# EAGLE board 9x9_backpack (EAGLE 6.2)
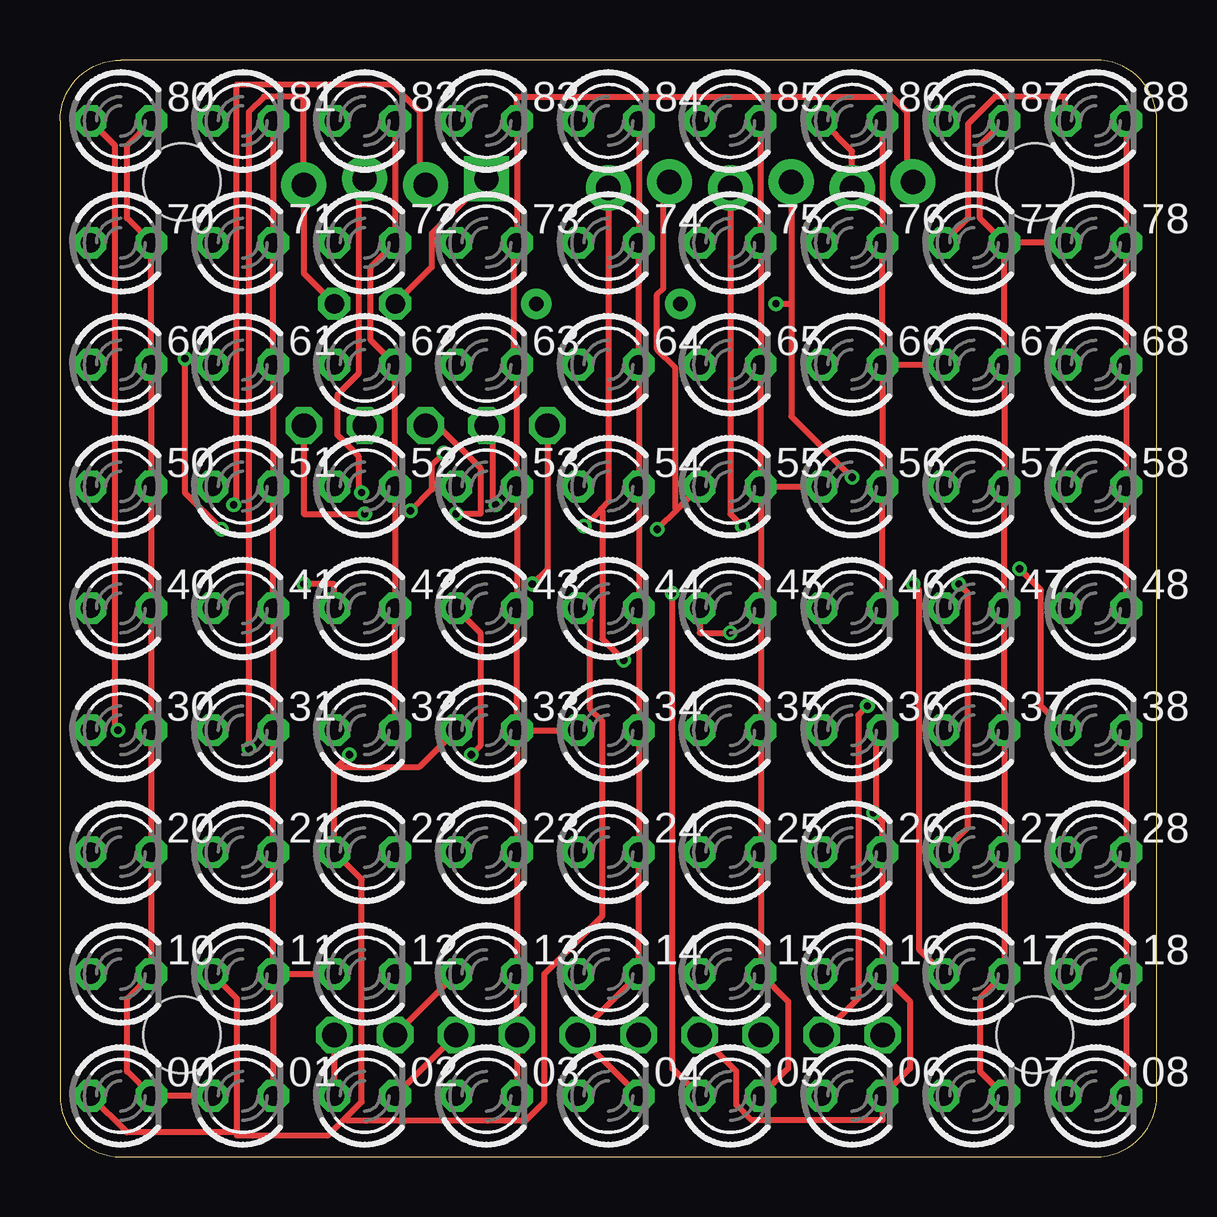
[diagram p0: board, top side]
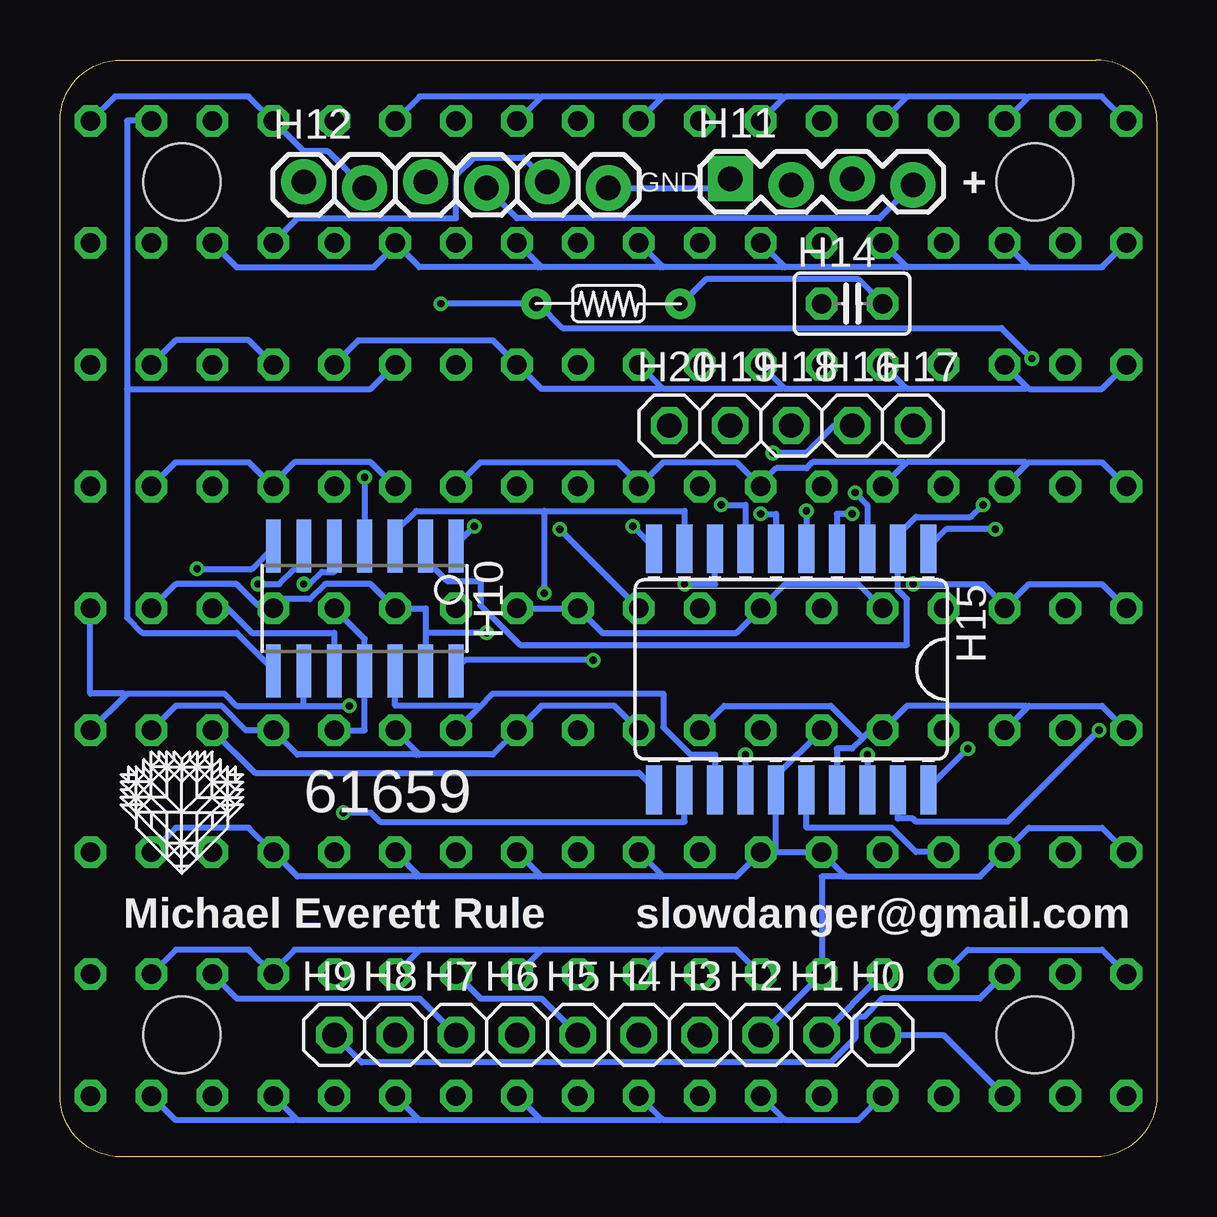
[diagram p1: board, bottom side, seen from below]

Size 45.72 x 45.72 mm. Coordinates in mm from the lower left corner, seen from the top.
Outline: 0,43.18 0,2.54 arc90 2.54,0 43.18,0 arc90 45.72,2.54 45.72,43.18 arc90 43.18,45.72 2.54,45.72 arc90 0,43.18
Copper layers (1*16): Top 0.035mm / dielectric 1.5mm / Bottom 0.035mm
Design rules: minimum track width 10mil, minimum drill 12mil, track to track 6mil, track to pad 6mil, pad to pad 6mil, via to via 6mil, smd to smd 0mil, copper to edge 20mil, drill to drill 10mil, minimum pad ring 10mil, minimum via ring 6mil, stop-mask expansion 2mil, vias tented up to drill 100mil, thermal gap 10mil
Holes 3.2 mm at 5.08,5.08 5.08,40.64 40.64,5.08 40.64,40.64

## Footprints (pad centres in the part's own frame; a part is rotated, then mirrored left to right if it is on the bottom)
LED3MM = drill 0.813 octagon: A -1.27,0; K 1.27,0
1X01 = drill 1.016 octagon: 1 0,0
SOIC14 = smd 0.61 x 2.21: 1 -3.81,-2.603; 2 -2.54,-2.603; 3 -1.27,-2.603; 4 0,-2.603; 5 1.27,-2.603; 6 2.54,-2.603; 7 3.81,-2.603; 8 3.81,2.603; 9 2.54,2.603; 10 1.27,2.603; 11 0,2.603; 12 -1.27,2.603; 13 -2.54,2.603; 14 -3.81,2.603
1X04_LOCK = drill 1.016 pad 1.88 square: 1 0,0.127 | drill 1.016 pad 1.88: 2 2.54,-0.127; 3 5.08,0.127; 4 7.62,-0.127
1X06_LOCK = drill 1.016 pad 1.88: 1 0,0; 2 2.54,-0.254; 3 5.08,0; 4 7.62,-0.254; 5 10.16,0; 6 12.7,-0.254
R-6 = drill 0.6 pad 1.27: P$1 -3,0; P$2 3,0
C025-025X050 = drill 0.813 octagon: 1 -1.27,0; 2 1.27,0
SO20L = smd 0.66 x 2.032: 1 -5.715,-5.029; 2 -4.445,-5.029; 3 -3.175,-5.029; 4 -1.905,-5.029; 5 -0.635,-5.029; 6 0.635,-5.029; 7 1.905,-5.029; 8 3.175,-5.029; 9 4.445,-5.029; 10 5.715,-5.029; 11 5.715,5.029; 12 4.445,5.029; 13 3.175,5.029; 14 1.905,5.029; 15 0.635,5.029; 16 -0.635,5.029; 17 -1.905,5.029; 18 -3.175,5.029; 19 -4.445,5.029; 20 -5.715,5.029

## Placement (x,y rotation side)
00  [LED3MM]  2.54,2.54 0 top
01  [LED3MM]  7.62,2.54 0 top
02  [LED3MM]  12.7,2.54 0 top
03  [LED3MM]  17.78,2.54 0 top
04  [LED3MM]  22.86,2.54 0 top
05  [LED3MM]  27.94,2.54 0 top
06  [LED3MM]  33.02,2.54 0 top
07  [LED3MM]  38.1,2.54 0 top
08  [LED3MM]  43.18,2.54 0 top
10  [LED3MM]  2.54,7.62 0 top
11  [LED3MM]  7.62,7.62 0 top
12  [LED3MM]  12.7,7.62 0 top
13  [LED3MM]  17.78,7.62 0 top
14  [LED3MM]  22.86,7.62 0 top
15  [LED3MM]  27.94,7.62 0 top
16  [LED3MM]  33.02,7.62 0 top
17  [LED3MM]  38.1,7.62 0 top
18  [LED3MM]  43.18,7.62 0 top
20  [LED3MM]  2.54,12.7 0 top
21  [LED3MM]  7.62,12.7 0 top
22  [LED3MM]  12.7,12.7 0 top
23  [LED3MM]  17.78,12.7 0 top
24  [LED3MM]  22.86,12.7 0 top
25  [LED3MM]  27.94,12.7 0 top
26  [LED3MM]  33.02,12.7 0 top
27  [LED3MM]  38.1,12.7 0 top
28  [LED3MM]  43.18,12.7 0 top
30  [LED3MM]  2.54,17.78 0 top
31  [LED3MM]  7.62,17.78 0 top
32  [LED3MM]  12.7,17.78 0 top
33  [LED3MM]  17.78,17.78 0 top
34  [LED3MM]  22.86,17.78 0 top
35  [LED3MM]  27.94,17.78 0 top
36  [LED3MM]  33.02,17.78 0 top
37  [LED3MM]  38.1,17.78 0 top
38  [LED3MM]  43.18,17.78 0 top
40  [LED3MM]  2.54,22.86 0 top
41  [LED3MM]  7.62,22.86 0 top
42  [LED3MM]  12.7,22.86 0 top
43  [LED3MM]  17.78,22.86 0 top
44  [LED3MM]  22.86,22.86 0 top
45  [LED3MM]  27.94,22.86 0 top
46  [LED3MM]  33.02,22.86 0 top
47  [LED3MM]  38.1,22.86 0 top
48  [LED3MM]  43.18,22.86 0 top
50  [LED3MM]  2.54,27.94 0 top
51  [LED3MM]  7.62,27.94 0 top
52  [LED3MM]  12.7,27.94 0 top
53  [LED3MM]  17.78,27.94 0 top
54  [LED3MM]  22.86,27.94 0 top
55  [LED3MM]  27.94,27.94 0 top
56  [LED3MM]  33.02,27.94 0 top
57  [LED3MM]  38.1,27.94 0 top
58  [LED3MM]  43.18,27.94 0 top
60  [LED3MM]  2.54,33.02 0 top
61  [LED3MM]  7.62,33.02 0 top
62  [LED3MM]  12.7,33.02 0 top
63  [LED3MM]  17.78,33.02 0 top
64  [LED3MM]  22.86,33.02 0 top
65  [LED3MM]  27.94,33.02 0 top
66  [LED3MM]  33.02,33.02 0 top
67  [LED3MM]  38.1,33.02 0 top
68  [LED3MM]  43.18,33.02 0 top
70  [LED3MM]  2.54,38.1 0 top
71  [LED3MM]  7.62,38.1 0 top
72  [LED3MM]  12.7,38.1 0 top
73  [LED3MM]  17.78,38.1 0 top
74  [LED3MM]  22.86,38.1 0 top
75  [LED3MM]  27.94,38.1 0 top
76  [LED3MM]  33.02,38.1 0 top
77  [LED3MM]  38.1,38.1 0 top
78  [LED3MM]  43.18,38.1 0 top
80  [LED3MM]  2.54,43.18 0 top
81  [LED3MM]  7.62,43.18 0 top
82  [LED3MM]  12.7,43.18 0 top
83  [LED3MM]  17.78,43.18 0 top
84  [LED3MM]  22.86,43.18 0 top
85  [LED3MM]  27.94,43.18 0 top
86  [LED3MM]  33.02,43.18 0 top
87  [LED3MM]  38.1,43.18 0 top
88  [LED3MM]  43.18,43.18 0 top
H0  [1X01]  11.43,5.08 0 bottom
H1  [1X01]  13.97,5.08 0 bottom
H2  [1X01]  16.51,5.08 0 bottom
H3  [1X01]  19.05,5.08 0 bottom
H4  [1X01]  21.59,5.08 0 bottom
H5  [1X01]  24.13,5.08 0 bottom
H6  [1X01]  26.67,5.08 0 bottom
H7  [1X01]  29.21,5.08 0 bottom
H8  [1X01]  31.75,5.08 0 bottom
H9  [1X01]  34.29,5.08 0 bottom
H10  [SOIC14]  33.02,22.86 180 bottom
H11  [1X04_LOCK]  17.78,40.64 0 bottom
H12  [1X06_LOCK]  35.56,40.64 0 bottom
H13  [R-6]  22.86,35.56 0 bottom
H14  [C025-025X050]  12.7,35.56 0 bottom
H15  [SO20L]  15.24,20.32 180 bottom
H16  [1X01]  12.7,30.48 0 bottom
H17  [1X01]  10.16,30.48 0 bottom
H18  [1X01]  15.24,30.48 0 bottom
H19  [1X01]  17.78,30.48 0 bottom
H20  [1X01]  20.32,30.48 0 bottom
H21  [LOGO]  40.64,14.35 0 bottom

## Library data of the parts
00 01-08 10-18 20-28 30-38 40-48 50-58 60-68 70-78 80-88 = led
H0 H1-H9 H16-H20 = pinhead
H10 = avr-5-4.16
H11 H12 = SparkFun
H13 = Mrule
H14 = ref-packages
H15 = cypress
H21 = mrule2

## Nets
D: 00.A 11.A 22.A 33.A 44.A 55.A 66.A 77.A 88.A H9.1 H10.8 H12.5 H15.18
S0: 00.K 01.A 02.A 03.A 04.A 05.A 06.A 07.A 08.A 10.K 20.K 30.K 40.K 50.K 60.K 70.K 80.K H0.1 H10.3 H15.9
S1: 01.K 10.A 11.K 12.A 13.A 14.A 15.A 16.A 17.A 18.A 21.K 31.K 41.K 51.K 61.K 71.K 81.K H1.1 H10.5 H15.16
S2: 02.K 12.K 20.A 21.A 22.K 23.A 24.A 25.A 26.A 27.A 28.A 32.K 42.K 52.K 62.K 72.K 82.K H2.1 H10.6 H15.15
S3: 03.K 13.K 23.K 30.A 31.A 32.A 33.K 34.A 35.A 36.A 37.A 38.A 43.K 53.K 63.K 73.K 83.K H3.1 H10.7 H12.1 H15.17
S4: 04.K 14.K 24.K 34.K 40.A 41.A 42.A 43.A 44.K 45.A 46.A 47.A 48.A 54.K 64.K 74.K 84.K H4.1 H10.13 H15.14
S5: 05.K 15.K 25.K 35.K 45.K 50.A 51.A 52.A 53.A 54.A 55.K 56.A 57.A 58.A 65.K 75.K 85.K H5.1 H10.12 H15.13
S6: 06.K 16.K 26.K 36.K 46.K 56.K 60.A 61.A 62.A 63.A 64.A 65.A 66.K 67.A 68.A 76.K 86.K H6.1 H10.11 H15.12
S7: 07.K 17.K 27.K 37.K 47.K 57.K 67.K 70.A 71.A 72.A 73.A 74.A 75.A 76.A 77.K 78.A 87.K H7.1 H10.10 H15.11
S8: 08.K 18.K 28.K 38.K 48.K 58.K 68.K 78.K 80.A 81.A 82.A 83.A 84.A 85.A 86.A 87.A 88.K H8.1 H10.9 H12.2 H15.19
S$1: H10.14 H11.1 H12.6 H14.1 H15.10
S$2: H10.1 H11.4 H12.4 H13.P$2 H14.2 H15.20
S$3: H10.4 H12.3 H13.P$1 H15.1
S$4: H10.2 H11.2 H15.2
S$5: H11.3 H15.3
S$6: H15.8 H20.1
S$7: H15.7 H19.1
S$8: H15.6 H18.1
S$9: H15.5 H16.1
S$10: H15.4 H17.1

## Tracks (layer width: path | path; a pad name or v marks a point on that pad's centre or on a via)
D  (via drill 0.3)
  Top 0.254: 55.A 25.72,26.99 | 25.72,26.99 v24.89,26.16 | H12.5 25.15,40.39 25.15,36.2 24.89,35.94 24.89,33.66 25.65,32.89 25.65,27.05 25.72,26.99 | 77.A 37.85,39.12 37.85,43.05 38.99,44.2 41.91,44.2 88.A | 11.62,16.32 11.43,16.13 22.A 12.57,11.56 12.57,2.29 11.87,1.59 | 11.62,16.32 v12.06,16.76 | 33.A 14.99,16.26 11.68,16.26 11.62,16.32 | 00.A 2.79,1.02 7.37,1.02 | 7.37,1.02 7.37,6.6 11.A | 11.87,1.59 11.18,0.89 7.37,0.89 7.37,1.02 | 44.A 22.1,22.35 22.1,18.67 22.61,18.16 22.61,10.03 20.19,7.62 20.19,2.29 19.43,1.52 11.94,1.52 11.87,1.59
  Bottom 0.254: v24.89,26.16 44.A | 42.93,32 42.93,43.18 88.A | 42.93,32 42.93,22.48 42.29,21.84 38.35,21.84 36.83,20.32 H10.8 | 66.A 32.77,32 42.93,32 | H12.5 26.42,41.66 28.45,41.66 29.21,40.89 29.21,39.12 35.81,39.12 77.A | v12.06,16.76 H15.18 | H9.1 33.15,3.94 13.59,3.94 12.57,4.95 12.57,5.84 12.19,5.84 11.43,6.6 7.37,6.6 11.A
S0  (via drill 0.3)
  Top 0.254: 80.K 2.79,42.16 2.79,39.12 70.K 60.K 50.K 40.K 30.K 20.K 10.K 2.79,6.6 2.79,3.56 00.K 01.A | H0.1 02.A | v25.53,23.5 25.53,3.68 05.A
  Bottom 0.254: H15.9 19.68,26.92 25.53,26.92 | 25.53,26.92 30.86,26.92 31.75,26.04 H10.3 | 15.56,1.59 15.49,1.52 12.45,1.52 02.A | 15.56,1.59 03.A | 20.64,1.59 20.57,1.52 15.62,1.52 15.56,1.59 | 20.64,1.59 04.A | 25.72,1.59 25.65,1.52 20.7,1.52 20.64,1.59 | 25.72,1.59 05.A | 30.8,1.59 30.73,1.52 25.78,1.52 25.72,1.59 | 30.8,1.59 06.A | 35.88,1.59 35.81,1.52 30.86,1.52 30.8,1.59 | 35.88,1.59 07.A | 08.A 40.89,1.52 35.94,1.52 35.88,1.59 | 01.A 8.89,5.08 H0.1 | v25.53,23.5 25.53,26.92
S1  (via drill 0.3)
  Top 0.254: 81.K 71.K 61.K 51.K 41.K 31.K 21.K 11.K | v35.56,23.88 35.81,23.62 35.81,8.64 17.A | 11.K 01.K | 11.K 12.A | H1.1 13.A
  Bottom 0.254: H15.16 14.61,13.72 11.05,13.72 10.03,12.7 21.K | H10.5 34.29,24.38 34.8,24.38 35.31,23.88 v35.56,23.88 | 18.A 40.89,8.64 37.85,8.64 17.A 36.83,7.75 35.94,8.64 30.86,8.64 30.8,8.57 | 10.A 2.29,8.64 7.87,8.64 11.K | 20.64,8.57 20.57,8.64 17.53,8.64 13.A | 20.64,8.57 14.A | 25.72,8.57 25.65,8.64 20.7,8.64 20.64,8.57 | 25.72,8.57 15.A | 30.8,8.57 30.73,8.64 25.78,8.64 25.72,8.57 | 30.8,8.57 16.A | H1.1 12.A
S2  (via drill 0.3)
  Top 0.254: 82.K 72.K 12.95,37.08 12.95,34.04 62.K 52.K 42.K 32.K | v37.47,23.88 37.85,23.5 37.85,13.72 27.A | H2.1 02.K
  Bottom 0.254: H10.6 35.56,24.51 35.94,24.51 36.58,23.88 v37.47,23.88 | 28.A 40.89,13.72 37.85,13.72 27.A 35.81,11.68 30.86,11.68 30.8,11.75 | H2.1 12.K 13.97,11.68 13.08,11.68 13.02,11.75 | 20.A 2.29,13.72 5.33,13.72 21.A 7.37,11.68 12.95,11.68 13.02,11.75 | 15.88,12.7 H15.15 15.88,15.88 32.K | 15.88,12.7 22.K 13.02,11.75 | 15.88,12.7 23.A 17.53,11.68 20.57,11.68 20.64,11.75 | 20.64,11.75 24.A | 25.72,11.75 25.65,11.68 20.7,11.68 20.64,11.75 | 25.72,11.75 25.A | 30.8,11.75 30.73,11.68 25.78,11.68 25.72,11.75 | 30.8,11.75 26.A
S3  (via drill 0.3)
  Top 0.254: H12.1 35.31,40.89 35.31,43.56 34.67,44.2 19.05,44.2 83.K 73.K 18.92,37.97 18.92,33.15 63.K 53.K 43.K 33.K | v40.01,24.51 40.89,23.62 40.89,18.8 38.A | 03.K H3.1 13.K 23.K 33.K | 33.K 34.A
  Bottom 0.254: H15.17 13.34,17.02 12.7,17.02 12.26,17.46 | 12.26,17.46 11.94,17.78 32.A 10.41,18.8 5.46,18.8 5.4,18.73 | 30.A 2.29,18.8 5.33,18.8 5.4,18.73 | 31.A 5.4,18.73 | v40.01,24.51 37.72,24.51 36.83,25.4 H10.7 | 34.A 22.61,18.8 25.65,18.8 35.A 27.69,16.76 30.73,16.76 30.8,16.83 | 30.8,16.83 36.A | 30.8,16.83 30.86,16.76 35.81,16.76 37.A 37.97,17.78 38.99,18.8 40.89,18.8 38.A | 12.26,17.46 13.59,18.8 18.03,18.8 33.K
S4  (via drill 0.3)
  Top 0.254: v17.14,16.76 17.53,17.14 17.53,21.84 43.A | v10.16,23.88 11.43,23.88 42.A | 04.K H4.1 21.72,5.08 21.72,5.21 14.K 24.K 34.K 44.K 54.K 64.K 74.K 84.K | v27.94,21.84 26.67,21.84 45.A
  Bottom 0.254: 40.A 2.29,23.88 5.33,23.88 41.A 6.35,22.99 7.24,23.88 v10.16,23.88 | v17.14,16.76 H15.14 | 42.A 12.45,23.88 15.49,23.88 43.A 17.53,21.84 23.11,21.84 44.K 45.A | 30.48,21.84 30.48,22.86 46.A 32.77,23.88 34.67,23.88 35.31,23.24 36.45,23.24 47.A 36.83,22.99 37.47,22.99 38.35,23.88 40.89,23.88 48.A | 30.48,21.84 H10.13 | v27.94,21.84 30.48,21.84
S5
  Top 0.254: 05.K 30.35,3.68 30.35,6.48 15.K 25.K 35.K 45.K 55.K | 85.K 75.K 65.K 55.K | 55.K 56.A
  Bottom 0.254: H5.1 25.65,6.6 28.19,6.6 15.K | H15.13 18.41,16.76 19.43,16.76 20.57,17.91 20.57,19.3 27.69,19.3 28.26,18.73 | 35.K 28.26,18.73 | H10.12 31.75,18.8 28.32,18.8 28.26,18.73 | 50.A 2.29,28.96 5.33,28.96 5.4,28.89 | 51.A 5.4,28.89 | 10.48,28.89 10.41,28.96 5.46,28.96 5.4,28.89 | 10.48,28.89 52.A | 10.48,28.89 10.54,28.96 14.35,28.96 14.61,28.7 15.88,28.7 16.51,28.07 53.A 17.53,28.96 20.57,28.96 54.A 21.59,28.07 22.48,28.96 28.19,28.96 55.K | 58.A 40.89,28.96 37.85,28.96 57.A 36.83,28.07 35.94,28.96 32.77,28.96 56.A
S6  (via drill 0.3)
  Top 0.254: 86.K 76.K 66.K | 66.K 56.K 46.K | 66.K 67.A | H6.1 28.19,3.56 28.19,2.16 28.83,1.52 34.29,1.52 06.K 35.43,3.68 35.43,6.48 16.K 26.K 34.29,13.97 v33.91,14.35 34.04,14.35 34.04,17.53 36.K
  Bottom 0.254: 60.A 2.29,32 5.33,32 5.4,32.07 | 61.A 5.4,32.07 | 10.48,32.07 10.41,32 5.46,32 5.4,32.07 | 10.48,32.07 62.A | 15.56,32.07 15.49,32 10.54,32 10.48,32.07 | 15.56,32.07 63.A | 20.64,32.07 20.57,32 15.62,32 15.56,32.07 | 20.64,32.07 64.A | 20.64,32.07 20.7,32 25.65,32 65.A 27.69,34.04 33.27,34.04 66.K | 68.A 40.89,34.04 37.85,34.04 67.A | 36.K 33.02,17.78 H10.11 33.02,21.59 46.K | H15.12 19.68,13.97 32.38,13.97 32.77,14.35 v33.91,14.35
S7
  Top 0.254: 78.A 77.K | 87.K 38.35,42.16 38.35,39.12 77.K | 77.K 67.K 57.K 47.K 37.K 27.K 17.K 38.35,6.6 38.35,3.56 07.K
  Bottom 0.254: 70.A 2.29,37.08 5.33,37.08 5.4,37.15 | 71.A 5.4,37.15 | 10.48,37.15 10.41,37.08 5.46,37.08 5.4,37.15 | 10.48,37.15 72.A | 15.56,37.15 15.49,37.08 10.54,37.08 10.48,37.15 | 15.56,37.15 73.A | 20.64,37.15 20.57,37.08 15.62,37.08 15.56,37.15 | 20.64,37.15 74.A | 25.72,37.15 25.65,37.08 20.7,37.08 20.64,37.15 | 25.72,37.15 75.A | 25.72,37.15 25.78,37.08 30.73,37.08 76.A 31.75,37.97 32.64,37.08 38.35,37.08 77.K | H10.10 34.29,21.84 37.72,21.84 38.73,22.86 47.K | H7.1 30.73,6.6 38.35,6.6 17.K | 37.K 37.59,16 21.59,16 20.95,15.37 H15.11
S8  (via drill 0.3)
  Top 0.254: 88.K 78.K 68.K 58.K 48.K | 08.K 18.K 28.K 38.K | H8.1 33.27,6.6 33.27,18.41 v33.66,18.8 | 86.A 33.02,41.91 H12.2 | v2.41,17.78 2.29,17.91 2.29,42.16 80.A
  Bottom 0.254: 35.56,18.8 H10.9 | 35.56,18.8 38.35,18.8 38.86,19.3 42.93,19.3 42.99,19.24 | 38.K 42.99,19.24 | 48.K 44.45,19.3 43.05,19.3 42.99,19.24 | 35.56,18.8 v33.66,18.8 | H12.2 34.54,41.91 35.56,41.91 87.A 37.85,44.2 43.43,44.2 88.K | H15.19 10.79,14.1 10.16,14.1 10.03,13.97 6.22,13.97 v2.41,17.78 | 5.4,44.13 5.33,44.2 2.29,44.2 80.A | 5.4,44.13 81.A | 10.48,44.13 10.41,44.2 5.46,44.2 5.4,44.13 | 10.48,44.13 82.A | 15.56,44.13 15.49,44.2 10.54,44.2 10.48,44.13 | 15.56,44.13 83.A | 20.64,44.13 20.57,44.2 15.62,44.2 15.56,44.13 | 20.64,44.13 84.A | 25.72,44.13 25.65,44.2 20.7,44.2 20.64,44.13 | 25.72,44.13 85.A | 86.A 30.73,44.2 25.78,44.2 25.72,44.13
S$1  (via drill 0.3)
  Top 0.254: H14.1 15.49,37.08 15.49,38.48 H11.1 | 22.54,26.99 22.86,27.3 H12.6 | 22.54,26.99 v21.84,26.29 | v23.5,20.7 22.61,21.59 22.61,26.92 22.54,26.99
  Bottom 0.254: v21.84,26.29 20.95,25.4 H15.10 | v23.5,20.7 28.83,20.7 29.21,20.32 H10.14 | H11.1 18.16,40.39 H12.6
S$2  (via drill 0.3)
  Top 0.254: v28.45,26.29 27.94,26.8 H12.4 | v7.87,17.02 7.87,43.56 8.51,44.2 10.16,44.2 H11.4 10.16,36.83 H14.2
  Bottom 0.254: v28.45,26.29 29.21,25.53 H10.1 | H14.2 12.45,36.58 18.8,36.58 19.81,35.56 H13.P$2 | v7.87,17.02 9.53,15.37 H15.20 | H12.4 26.67,39.12 11.56,39.12 H11.4
S$3  (via drill 0.3)
  Top 0.254: v33.02,28.32 30.48,30.86 30.48,35.56 | H12.3 30.48,35.56 | v6.73,26.16 5.21,27.69 v5.21,33.27 | v29.84,35.56 30.48,35.56
  Bottom 0.254: v33.02,28.32 H10.4 | v6.73,26.16 8.76,26.16 9.53,25.4 H15.1 | v5.21,33.27 6.48,34.54 24.77,34.54 25.78,35.56 H13.P$1 v29.84,35.56
S$4  (via drill 0.3)
  Top 0.254: H11.2 14.99,40.77 14.99,43.56 13.84,44.7 7.37,44.7 7.37,27.3 v7.24,27.18
  Bottom 0.254: H10.2 30.48,24.89 29.59,24 28.19,24 28.19,22.99 26.54,21.34 10.41,21.34 10.41,23.24 10.79,23.62 H15.2 10.79,25.91 10.03,26.67 7.75,26.67 v7.24,27.18
S$5  (via drill 0.3)
  Top 0.254: v12.57,27.69 12.45,27.81 12.45,29.21 11.56,30.1 11.56,31.75 12.45,32.64 12.45,40.51 H11.3
  Bottom 0.254: H15.3 12.06,27.18 v12.57,27.69
S$6  (via drill 0.3)
  Top 0.254: v19.68,23.88 20.32,24.51 H20.1
  Bottom 0.254: H15.8 18.41,23.88 v19.68,23.88
S$7  (via drill 0.3)
  Top 0.254: v18.16,27.18 18.03,27.3 18.03,30.23 H19.1
  Bottom 0.254: H15.7 17.14,27.18 v18.16,27.18
S$8  (via drill 0.3)
  Top 0.254: v16.51,26.8 17.53,26.8 17.53,28.7 15.75,30.48 H18.1
  Bottom 0.254: H15.6 15.88,26.8 v16.51,26.8
S$9  (via drill 0.3)
  Top 0.254: v14.61,26.92 15.49,27.81 15.49,28.83 v16,29.34
  Bottom 0.254: v14.61,26.92 H15.5 | v16,29.34 14.61,29.34 13.46,30.48 H16.1
S$10  (via drill 0.3)
  Top 0.254: v12.7,26.8 10.16,26.8 H17.1
  Bottom 0.254: H15.4 13.34,26.8 v12.7,26.8

## Text on the board
bPlace: + | GND | 61659 | slowdanger@gmail.com | Michael Everett Rule